# Altium PCB AdaptadorUSBSerialRS232.PcbDoc
Units mil, origin at the board's own origin, x right, y up, seen from the top; angles counter-clockwise.
Board outline 2378.52 x 1000.56 mil, 2 copper layers (Top Layer, Bottom Layer), stack 65.792 mil thick; 27 components, 35 nets, 155 pads, 52 vias.
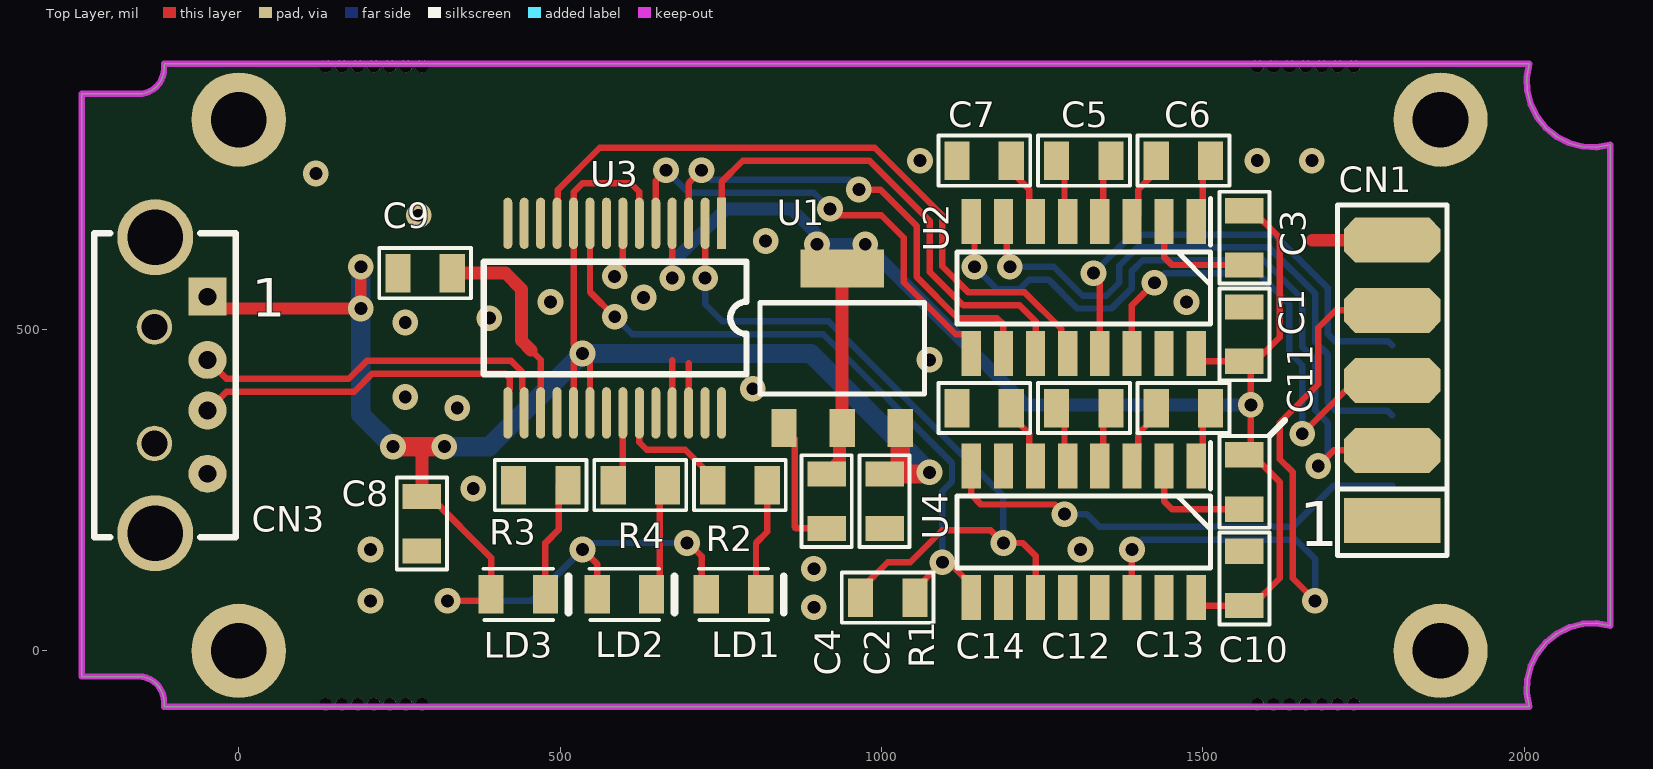
[diagram p0: Top Layer view]
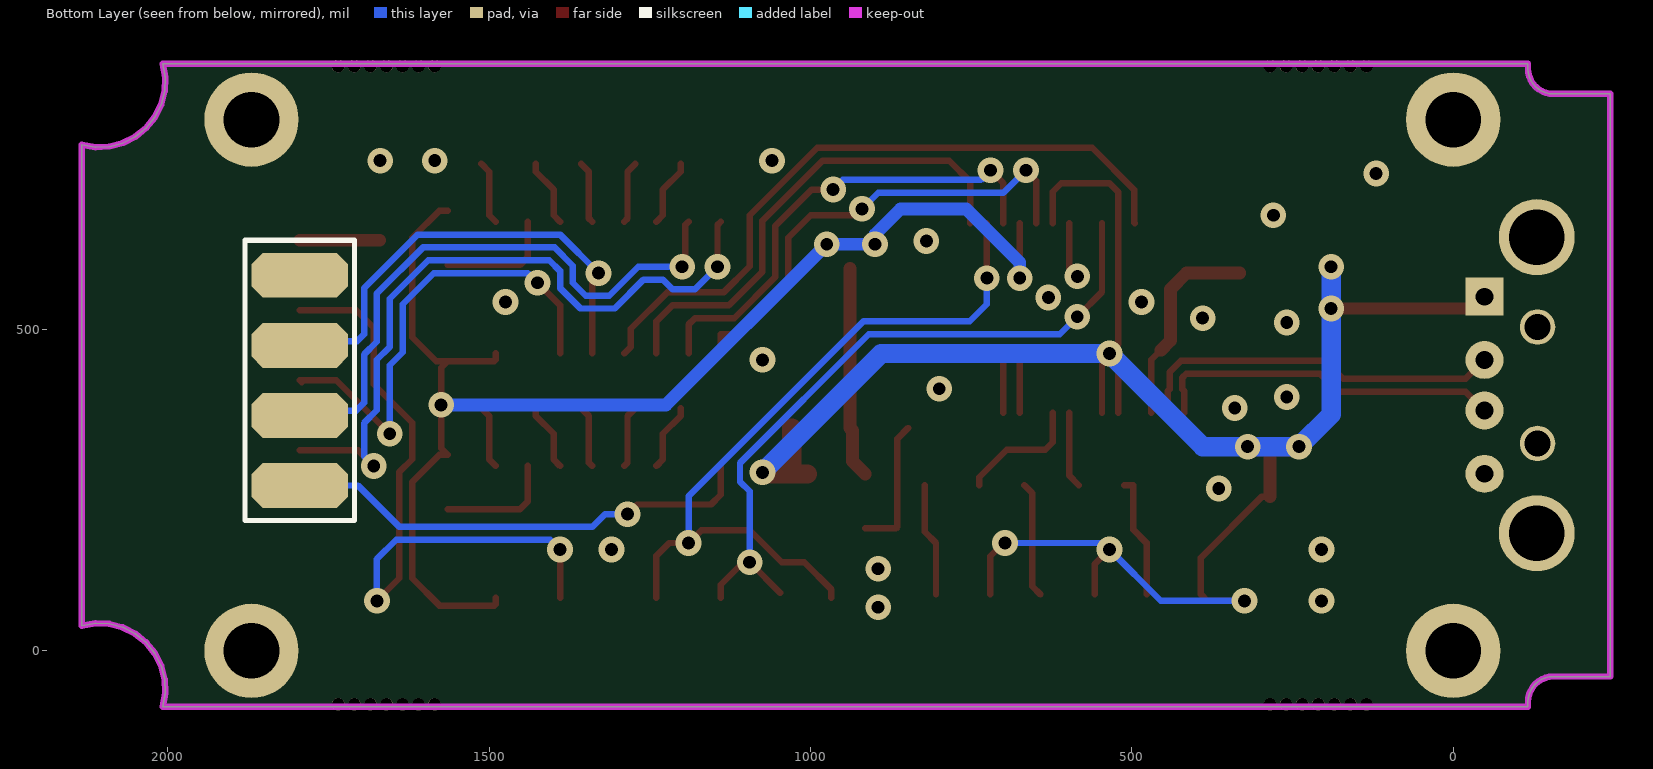
[diagram p1: Bottom Layer view, seen from below]
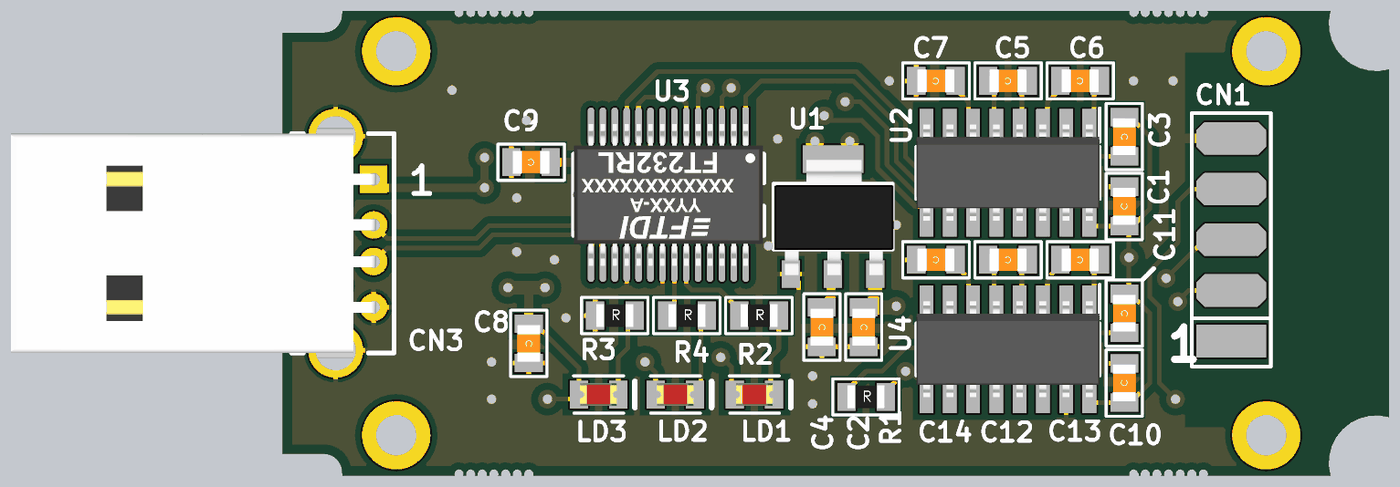
[diagram p2: 3D render of the assembled board from above, using the file's embedded part models]

## Layer stack, top to bottom
Top Solder: solder mask 0.4, Solder Resist, Dk 3.5
Top Layer: signal copper 1.4
Dielectric 1: dielectric 62.9921, FR-4, Dk 4.8
Bottom Layer: signal copper 1.4
Bottom Solder: solder mask 0.4, Solder Resist, Dk 3.5

## Board outline
-116.42,-86.9 -116.42,-79.31 -116.85,-73.5 -118.13,-67.83 -120.43,-62 -123.62,-56.61 -127.63,-51.79 -132.35,-47.67 -137.67,-44.35 -143.44,-41.92 -149.53,-40.43 -155.78,-39.94 -244.38,-39.94 -244.38,866.71 -155.78,866.71 -149.98,867.14 -144.32,868.41 -138.49,870.71 -133.09,873.9 -128.28,877.91 -124.16,882.64 -120.84,887.96 -118.41,893.73 -116.92,899.83 -116.42,906.08 -116.42,913.67 2008.09,913.67 2004.42,892.34 2005.33,870.73 2010.78,849.79 2020.52,830.47 2034.11,813.63 2050.94,800.04 2070.26,790.31 2091.2,784.86 2112.82,783.95 2134.14,787.61 2134.14,39.16 2112.82,42.82 2091.2,41.91 2070.26,36.47 2050.94,26.73 2034.11,13.14 2020.52,-3.7 2010.78,-23.02 2005.33,-43.96 2004.42,-65.57 2008.09,-86.9

## Design rules (kind name [scope] priority, off if disabled: settings)
Clearance Clearance_Poly [InPolygon] p1: gap=15 ignorepadtopadclearanceinfootprint=FALSE except(0: Arc-Hole Track-Hole SMDPad-Hole THPad-Hole Via-Hole Fill-Hole Poly-Hole Region-Hole Text-Hole)
Clearance [All] p2: gap=10 ignorepadtopadclearanceinfootprint=FALSE except(0: Arc-Hole Track-Hole SMDPad-Hole THPad-Hole Via-Hole Fill-Hole Poly-Hole Region-Hole Text-Hole)
ComponentClearance [All] p1: gap=5 collisioncheckmode=3 verticalgap=0 showdistances=FALSE
DiffPairsRouting [All] p1: maxlimit=10 minlimit=10 mostfreqgap=10 toplayer_minwidth=10 toplayer_maxwidth=10 toplayer_prefwidth=10 bottomlayer_minwidth=10 bottomlayer_maxwidth=10 bottomlayer_prefwidth=10 maxuncoupledlength=500
PolygonConnect PolygonConnect_Via [IsVia] p1: connectstyle=Direct reliefconductorwidth=10 reliefentries=4 polygonreliefangle="90 Angle" airgapwidth=10
PolygonConnect [All] p2: connectstyle=Relief reliefconductorwidth=10 reliefentries=4 polygonreliefangle="90 Angle" airgapwidth=10
RoutingVias [All] p1: holewidth=28 width=50 viastyle="Through Hole" minholewidth=20 minwidth=40 maxholewidth=28 maxwidth=50
SilkToSilkClearance [All] p1 off: silktosilkclearance=10
SolderMaskExpansion [All] p1: expansion=4
Width [All] p1: maxlimit=30 minlimit=10 preferedwidth=10 minimp=50.000000 maximp=50.000000 favimp=50.000000
27 further rules are at their usual default settings.

## Classes and differential pairs
differential pair D: +D_P -D_N

## Components (designator, comment, footprint, x,y, rotation, side; value= is the part's Value field where it differs from the comment)
C1 "100n" 0805C 1564.88,492.83 r90 top
C2 "100n" 0805C 1004.88,232.83 r270 top
C3 "100n" 0805C 1564.88,642.83 r270 top
C4 "10u" 0805C 914.88,232.83 r270 top
C5 "100n" 0805C 1314.88,762.83 r180 top
C6 "100n" 0805C 1469.88,762.83 r180 top
C7 "100n" 0805C 1159.88,762.83 r180 top
C8 "10u" 0805C 284.88,197.83 r270 top
C9 "100n" 0805C 289.88,587.83 r180 top
C10 "100n" 0805C 1564.88,112.83 r90 top
C11 "100n" 0805C 1564.88,262.83 r270 top
C12 "100n" 0805C 1314.88,377.83 r180 top
C13 "100n" 0805C 1469.88,377.83 r180 top
C14 "100n" 0805C 1159.88,377.83 r180 top
CN1 "DB9M" BARRA1X9 1794.88,420.94 r90 top
CN3 "USB" "USB-B 90" -90,413.39 r270 top
LD1 "RED" 0805L 769.88,87.83 r180 top
LD2 "RED" 0805L 599.88,87.83 r180 top
LD3 "RED" 0805L 434.88,87.83 r180 top
R1 "0" 0805R 1009.88,82.83 r0 top
R2 "680" 0805R 779.88,257.83 r0 top
R3 "680" 0805R 469.88,257.83 r0 top
R4 "680" 0805R 624.88,257.83 r0 top
U1 "LM1117" SOT223 848.33,346.83 r0 top
U2 "MAX3232" SO16 1489.88,667.83 r270 top
U3 "FT232RL" SSOP28-175-0.64 584.88,517.83 r270 top
U4 "MAX3232" SO16 1489.88,287.83 r270 top

## Footprints (in the part's own frame and the unit in brackets; to place one, negate y for a bottom-side part, rotate by r counter-clockwise, add the part's x,y. Pads: shape width x height; smd on the part's side, far side on the other; paste and mask are expansions set on the pad)
0805C [mil]
  rect 39.37x60 smd: 1(-42.3,0) 2(42.3,0)
  silkscreen extent -72,-39 71,39, body extent -40,-25 40,25, height 36
0805L [mil] "LED 0805"
  rect 39.37x60 smd: 1(-42.3,0) 2(42.3,0)
  silkscreen extent -78,-40 54,40, body extent -40,-25 40,25, height 43
0805R [mil] "Resistor"
  rect 39.37x60 smd: 1(-42.3,0) 2(42.3,0)
  silkscreen extent -72,-39 71,39, body extent -40,-25 40,24, height 20
BARRA1X9 [mil] "ESPERA DB9"
  rect 70x150 smd: 1(-218.11,0)
  oct 70x150 smd: 2(-109.06,0) 3(0,0) 4(109.06,0) 5(218.11,0)
  oct 70x150 smd far side: 6(-163.58,0) 7(-54.53,0) 8(54.53,0) 9(163.58,0)
  silkscreen extent -273,-85 273,85
SO16 [mil]
  rect 70x30 smd: 1(0,0) 2(0,-50) 3(0,-100) 4(0,-150) 5(0,-200) 6(0,-250) 7(0,-300) 8(0,-350) 9(205,-350) 10(205,-300) 11(205,-250) 12(205,-200) 13(205,-150) 14(205,-100) 15(205,-50) 16(205,0)
  silkscreen extent -36,-372 159,22, body extent -1,-372 206,22, height 55
SOT223 [mm]
  rect 1x1.5 smd: 1(0,0) 2(2.3,0) 3(4.6,0)
  rect 3.3x1.5 smd: 2(2.3,6.3)
  silkscreen extent -0.95,1.35 5.55,4.95, body extent -0.9,-0.05 5.6,6.25, height 1.68
SSOP28-175-0.64 [mil]
  rect 80x14 smd: 1(-147.5,166.34)
  oval 80x14 smd: 2(-147.5,140.75) 3(-147.5,115.16) 4(-147.5,89.57) 5(-147.5,63.98) 6(-147.5,38.39) 7(-147.5,12.8) 8(-147.5,-12.8) 9(-147.5,-38.39) 10(-147.5,-63.98) 11(-147.5,-89.57) 12(-147.5,-115.16) 13(-147.5,-140.75) 14(-147.5,-166.34) 15(147.5,-166.34) 16(147.5,-140.75) 17(147.5,-115.16) 18(147.5,-89.57) 19(147.5,-63.98) 20(147.5,-38.39) 21(147.5,-12.8) 22(147.5,12.8) 23(147.5,38.39) 24(147.5,63.98) 25(147.5,89.57) 26(147.5,115.16) 27(147.5,140.75) 28(147.5,166.34)
  silkscreen extent -88,-204 88,205, body extent -153,-203 153,203, height 85
"USB-B 90" [mm] "Conector USB fêmea 90°"
  rect 1.5x1.5 hole 0.7: 1(-3.5,1.05)
  round 1.5 hole 0.7: 2(-1,1.05) 3(1,1.05) 4(3.5,1.05)
  round 1.397 hole 1.016: PH0(-2.3,-1.05) PH1(2.3,-1.05)
  round 3 hole 2.2: PH2(-5.851,-1.018) PH3(5.851,-1.018)
  silkscreen extent -6,-3.43 6,2.16, body extent -6.3,-18.75 6.3,1.18, height 3.14

## Part data
C1 C2 C3 C5 C6 C7 C10 C11 C12 C13 C14: library part CAP, "CAPACITOR SMD 0805 100nF/50V X7R", Meu PN=10.10.104
C4 C8: library part CAP, "CAPACITOR SMD 0805 10UF/6,3V X7R", Meu PN=10.10.106
C9: library part CAP, "CAPACITOR SMD 0805 100NF/50V X7R", Meu PN=10.10.104
CN1: library part "Header 9", "Espera para DB9 M"
CN3: library part "Header 6", "CONECTOR USB", Meu PN=11.10.001
LD1 LD2 LD3: library part LED, "LED 0805 VERMELHO", Meu PN=10.11.001
  LD1: Funcao=TX
  LD2: Funcao=RX
  LD3: Funcao=PW
R1: library part RES, "RESISTOR SMD 0805 0 OHM (JUMPER)", Meu PN=10.12.000
R2 R3 R4: library part RES, "RESISTOR SMD 0805 680 OHM", Meu PN=10.12.681
U1: "REGULADOR LINEAR SMD LM1117MPX-3.3", Meu PN=10.13.117
U2 U4: library part MAX232, "CI SMD MAX3232 SO16 NARROW", Meu PN=10.13.323
U3: library part CMP-0078-00027-1, "USB UART FT232RL, SSOP-28, Tray"

## Free pads (board coordinates)
  round 146.8 hole 86.61: 1(0,826.77) 1(0,0) 1(1870.08,826.77) 1(1870.08,0)
  round 19.68 hole 19.68 unplated paste+0: 7(160,910) 7(160,-83.23) 7(1710.08,910) 7(1710.08,-83.23) 8(135,910) 8(135,-83.23) 8(185,910) 8(185,-83.23) 8(210,910) 8(210,-83.23) 8(235,910) 8(235,-83.23) 8(260,910) 8(260,-83.23) 8(285,910) 8(285,-83.23) 8(1585.08,910) 8(1585.08,-83.23) 8(1610.08,910) 8(1610.08,-83.23) 8(1635.08,910) 8(1635.08,-83.23) 8(1660.08,910) 8(1660.08,-83.23) 8(1685.08,910) 8(1685.08,-83.23) 8(1735.08,910) 8(1735.08,-83.23)

## Via types
v1: diameter 40, hole 20, Top Layer to Bottom Layer, tented both sides, 52 vias

## Nets (pads, with @x,y where several pads share a name; then routed paths per layer and width w, separated by ;. In a path a pad name is that pad's centre, name@x,y a point inside that pad or via, vN(x,y) a via of type N, cw(c..) or ccw(c..) an arc to the next point about the centre after c; other vN are vias at no path point)
232_CTS: CN1.8 U2.13 | length 732.3
  Top Layer w10: v1(1329.88,587.83) 1339.88,577.83 U2.13
  Bottom Layer w10: v1(1329.88,587.83) 1389.88,647.83 1611.45,647.83 1694.88,564.4 1694.88,492.83 1705.72,482 1788.35,482 CN1.8
232_DSR: CN1.6 U4.8 | length 747.4
  Top Layer w10: U4.8 1139.88,242.83 1154.88,227.83 1269.88,227.83 v1(1284.88,212.83)
  Bottom Layer w10: v1(1284.88,212.83) 1319.88,212.83 1339.88,192.83 1639.83,192.83 1704.36,257.36 CN1.6
232_DTR: CN1.4 U4.14 | length 1042.5
  Top Layer w10: U4.14 v1(1389.88,157.83) ; v1(1674.88,77.83) 1639.88,112.83 1639.88,278.34 1619.88,298.34 1619.88,354.88 1680,415 1680,502.95 1707.05,530 CN1.4
  Bottom Layer w10: v1(1389.88,157.83) 1404.88,172.83 1644.88,172.83 1674.88,142.83 v1(1674.88,77.83)
232_RTS: CN1.7 U2.7 | length 930.6
  Top Layer w10: U2.7 1194.88,662.83 1194.88,602.83 v1(1199.88,597.83)
  Bottom Layer w10: v1(1199.88,597.83) 1268.17,597.83 1313.17,552.83 1349.88,552.83 1369.88,572.83 1369.88,599.55 1398.17,627.83 1603.17,627.83 1674.88,556.12 1674.88,481.12 1694.88,461.12 1694.88,386.12 1707,374 1787.3,374 CN1.7
232_RX: CN1.2 U2.8 | length 1100.7
  Top Layer w10: U2.8 1144.88,662.83 v1(1144.88,597.83) ; v1(1679.88,287.83) 1703.94,311.89 CN1.2
  Bottom Layer w10: v1(1144.88,597.83) 1179.88,562.83 1214.88,562.83 1229.88,577.83 1259.88,577.83 1304.88,532.83 1358.17,532.83 1389.88,564.55 1389.88,591.27 1406.45,607.83 1594.88,607.83 1654.88,547.83 1654.88,472.83 1674.88,452.83 1674.88,374.55 1694.88,354.55 1694.88,302.83 v1(1679.88,287.83)
232_TX: CN1.3 U2.14 | length 749.5
  Top Layer w10: U2.14 1389.88,537.83 v1(1424.88,572.83) ; v1(1654.88,337.83) 1737.99,420.94 CN1.3 CN1.3@1791.77,417.83
  Bottom Layer w10: v1(1424.88,572.83) 1439.88,587.83 1586.6,587.83 1634.88,539.55 1634.88,464.55 1654.88,444.55 v1(1654.88,337.83)
+3.3: C1.1 C3.1 C4.1 C10.1 C11.1 U1.2 U2.16 U3.4 U4.16 | length 2428.2
  Top Layer w10: v1(674.45,580) U3.4 ; U4.16 1489.88,72.83 1492.18,70.53 C10.1 1577.58,70.53 1619.88,112.83 1619.88,262.83 1577.58,305.14 C11.1 1574.88,315.14 v1(1574.88,382.83) 1574.88,440.53 C1.1 ; U2.16 1489.88,452.83 1492.18,450.53 C1.1 ; C3.1 1577.58,685.14 1619.88,642.83 1619.88,487.83 1582.58,450.53 C1.1
  Top Layer w20: C4.1 934.88,295.14 934.88,342.83 938.88,346.83 U1.2@938.88,594.87
  Bottom Layer w20: v1(674.45,580) 674.45,604.45 757.83,687.83 859.88,687.83 899.88,647.83 v1(899.88,632.83) v1(974.88,632.83) 1224.88,382.83 v1(1574.88,382.83)
CTS: U2.12 U3.11 | length 1068.8
  Top Layer w10: U3.11 496.08,666.1 496.08,717.32 561.6,782.83 989.73,782.83 1094.88,677.69 1094.88,598.34 1135.38,557.83 1223.17,557.83 1279.88,501.12 1279.88,472.83 U2.12
D_N: CN3.2 U3.16 | length 585.4
  Top Layer w10: CN3.2 -19.29,423.39 171.22,423.39 199.03,451.19 423.76,451.19 441.34,433.62 441.34,407.21 444.13,404.42 U3.16
D_P: CN3.3 U3.15 | length 552.3
  Top Layer w10: CN3.3 -19.29,403.39 179.51,403.39 207.31,431.19 415.48,431.19 421.34,425.33 421.34,407.21 418.54,404.42 U3.15
DSR: R1.2 U3.9 U4.9 | length 1088.1
  Top Layer w10: U3.9 546.5,558.5 v1(585,520) ; R1.2@1047.18,90.14 v1(1094.88,137.83) 1104.88,137.83 1139.88,102.83 U4.9
  Bottom Layer w10: v1(585,520) 612.17,492.83 909.38,492.83 1109.88,292.33 1109.88,263.34 1094.88,248.34 v1(1094.88,137.83)
DTR: R1.1 U3.2 U4.11 | length 1191.5
  Top Layer w10: v1(725.63,580) U3.2 ; R1.1 967.58,95.53 1009.88,137.83 1044.88,137.83 1094.88,187.83 1169.88,187.83 v1(1189.88,167.83) 1219.88,167.83 1239.88,147.83 U4.11
  Bottom Layer w10: v1(725.63,580) 725.63,539.37 752.17,512.83 917.66,512.83 1189.88,240.62 v1(1189.88,167.83)
GND: C1.2 C2.2 C4.2 C7.2 C8.2 C9.2 C10.2 C14.2 CN1.5 CN3.4 CN3.PH2 CN3.PH3 R3.1 U1.1 U2.15 U3.7 U3.18 U3.21 U3.25 U3.26 U4.15 | length 582.8
  Top Layer w10: v1(584.88,582.83) 597.68,595.63 U3.7 ; U3.25 674.45,452.4 ; U3.26 700.04,447.68 ; U1.1 864.88,330.28 864.88,192.83 867.18,190.53 C4.2
  Top Layer w20: 1671.1,639.06 CN1.5
  other v1: 894.88,67.83 204.88,77.83 894.88,127.83 204.88,157.83 1309.88,157.83 364.88,252.83 339.88,377.83 259,395 799.88,407.83 1074.88,452.83 259,511 389.88,517.83 484.88,542.83 1474.88,542.83 630,550 819.88,637.83 279.88,677.83 119.88,742.83 1059.88,762.83 1584.88,762.83 1669.88,762.83
NetC3_2: C3.2 U2.2 | length 185.1
  Top Layer w10: U2.2 1439.88,612.83 1452.18,600.53 C3.2
NetC5_1: C5.1 U2.4 | length 97.2
  Top Layer w10: U2.4 1344.88,672.83 1344.88,745.53 C5.1@1357.18,757.83
NetC5_2: C5.2 U2.5 | length 97.2
  Top Layer w10: C5.2@1272.58,757.83 1284.88,745.53 1284.88,672.83 U2.5
NetC6_1: C6.1 U2.1 | length 99.2
  Top Layer w10: U2.1 1499.88,677.83 1499.88,745.53 C6.1@1512.18,757.83
NetC6_2: C6.2 U2.3 | length 105.6
  Top Layer w10: U2.3 1399.88,677.83 1399.88,717.83 1427.58,745.53 C6.2@1427.58,757.83
NetC7_1: C7.1 U2.6 | length 105.6
  Top Layer w10: C7.1@1202.18,757.83 1202.18,745.53 1229.88,717.83 1229.88,677.83 U2.6
NetC9_1: C9.1 U3.17 | length 322.9
  Top Layer w10: 454.88,467.83 469.72,452.99 U3.17
  Top Layer w20: C9.1 414.88,587.83 439.88,562.83 439.88,482.83 454.88,467.83
NetC11_2: C11.2 U4.2 | length 185.1
  Top Layer w10: U4.2 1439.88,232.83 1452.18,220.53 C11.2
NetC12_1: C12.1 U4.4 | length 97.2
  Top Layer w10: U4.4 1344.88,292.83 1344.88,365.53 C12.1
NetC12_2: C12.2 U4.5 | length 97.2
  Top Layer w10: C12.2 1284.88,365.53 1284.88,292.83 U4.5
NetC13_1: C13.1 U4.1 | length 99.2
  Top Layer w10: U4.1 1499.88,297.83 1499.88,365.53 C13.1
NetC13_2: C13.2 U4.3 | length 105.6
  Top Layer w10: U4.3 1399.88,297.83 1399.88,337.83 1427.58,365.53 C13.2
NetC14_1: C14.1 U4.6 | length 105.6
  Top Layer w10: C14.1 1202.18,365.53 1229.88,337.83 1229.88,297.83 U4.6
NetLD1_1: LD1.1 R2.2 | length 177.2
  Top Layer w10: LD1.1@804.88,87.83 804.88,167.83 822.18,185.14 R2.2
NetLD2_1: LD2.1 R4.2 | length 180.4
  Top Layer w10: LD2.1 654.88,100.53 654.88,245.53 R4.2
NetLD3_1: LD3.1 R3.2 | length 193.1
  Top Layer w10: LD3.1 477.18,168.02 497.58,188.41 497.58,257.83 R3.2
NetR2_1: R2.1 U3.23 | length 195
  Top Layer w10: U3.23 623.27,324.45 634.88,312.83 694.88,312.83 737.58,270.14 R2.1
NetR4_1: R4.1 U3.22 | length 118.8
  Top Layer w10: R4.1 597.68,272.93 U3.22
RTS: U2.10 U3.3 | length 751.6
  Top Layer w10: U3.3 700.04,727.99 v1(719.88,747.83) ; v1(964.88,717.83) 998.17,717.83 1054.88,661.12 1054.88,581.77 1118.82,517.83 1179.88,517.83 1189.88,507.83 U2.10
  Bottom Layer w10: v1(719.88,747.83) 734.88,732.83 949.88,732.83 v1(964.88,717.83)
RX: U2.9 U3.5 | length 740.4
  Top Layer w10: U3.5 648.86,731.81 v1(664.88,747.83) ; v1(919.88,687.83) 929.88,677.83 999.88,677.83 1034.88,642.83 1034.88,573.48 1115.53,492.83 1139.88,492.83 U2.9
  Bottom Layer w10: v1(664.88,747.83) 699.88,712.83 894.88,712.83 v1(919.88,687.83)
TX: U2.11 U3.1 | length 766.8
  Top Layer w10: U3.1 751.22,729.68 784.38,762.83 981.45,762.83 1074.88,669.4 1074.88,590.05 1127.1,537.83 1214.88,537.83 1239.88,512.83 U2.11
VCC: C2.1 C8.1 CN3.1 LD1.2 LD2.2 LD3.2 U1.3 U3.6 U3.10 U3.19 U3.20 | length 3355.6
  Top Layer w10: C8.1 297.58,240.14 392.58,145.14 LD3.2 382.58,77.83 v1(324.88,77.83) ; U3.19 520.91,448.86 v1(534.88,462.83) ; v1(534.88,157.83) 557.58,135.14 LD2.2 ; U3.20 546.5,451.22 v1(534.88,462.83) ; U3.6 623.27,714.45 609.88,727.83 534.88,727.83 520.91,713.86 U3.10 520.91,476.81 v1(534.88,462.83) ; v1(697.38,167.83) 699.88,167.83 720.28,147.44 LD1.2@720.28,87.83
  Top Layer w18: CN3.1 -30.32,532.83 v1(189.88,532.83) v1(189.88,597.83)
  Top Layer w20: C8.1 284.88,317.83
  Top Layer w30: v1(239.88,317.83) 284.88,317.83 v1(319.88,317.83) ; C2.1 C2.1@1029.43,275.14 ; U1.3 C2.1@1029.43,275.14 ; v1(1074.88,277.83) 1072.18,275.14 C2.1@1029.43,275.14
  Bottom Layer w10: v1(324.88,77.83) 454.88,77.83 v1(534.88,157.83) 544.88,167.83 v1(697.38,167.83)
  Bottom Layer w30: v1(189.88,597.83) v1(189.88,532.83) 189.88,367.83 v1(239.88,317.83) v1(319.88,317.83) 389.88,317.83 v1(534.88,462.83) 889.88,462.83 v1(1074.88,277.83)
pads on no net: CN1.1 CN1.9 CN3.PH0 CN3.PH1 U3.8 U3.12 U3.13 U3.14 U3.24 U3.27 U3.28 U4.7 U4.10 U4.12 U4.13

## Polygon pours and split planes (outlines as drawn)
GND on Bottom Layer "Top Bottom" (solid, remove dead copper, shelved, pour order 5): -116.42,-86.9 -116.42,-79.31 -116.85,-73.5 -118.13,-67.83 -120.43,-62 -123.62,-56.61 -127.63,-51.79 -132.35,-47.67 -137.67,-44.35 -143.44,-41.92 -149.53,-40.43 -155.78,-39.94 -244.38,-39.94 -244.38,866.71 -155.78,866.71 -149.98,867.14 -144.32,868.41 -138.49,870.71 -133.09,873.9 -128.28,877.91 -124.16,882.64 -120.84,887.96 -118.41,893.73 -116.92,899.83 -116.42,906.08 -116.42,913.67 2008.09,913.67 2004.42,892.34 2005.33,870.73 2010.78,849.79 2020.52,830.47 2034.11,813.63 2050.94,800.04 2070.26,790.31 2091.2,784.86 2112.82,783.95 2134.14,787.61 2134.14,39.16 2112.82,42.82 2091.2,41.91 2070.26,36.47 2050.94,26.73 2034.11,13.14 2020.52,-3.7 2010.78,-23.02 2005.33,-43.96 2004.42,-65.57 2008.09,-86.9
GND on Top Layer "Top Layer" (solid, remove dead copper, shelved, pour order 4): -116.42,-86.9 -116.42,-79.31 -116.85,-73.5 -118.13,-67.83 -120.43,-62 -123.62,-56.61 -127.63,-51.79 -132.35,-47.67 -137.67,-44.35 -143.44,-41.92 -149.53,-40.43 -155.78,-39.94 -244.38,-39.94 -244.38,866.71 -155.78,866.71 -149.98,867.14 -144.32,868.41 -138.49,870.71 -133.09,873.9 -128.28,877.91 -124.16,882.64 -120.84,887.96 -118.41,893.73 -116.92,899.83 -116.42,906.08 -116.42,913.67 2008.09,913.67 2004.42,892.34 2005.33,870.73 2010.78,849.79 2020.52,830.47 2034.11,813.63 2050.94,800.04 2070.26,790.31 2091.2,784.86 2112.82,783.95 2134.14,787.61 2134.14,39.16 2112.82,42.82 2091.2,41.91 2070.26,36.47 2050.94,26.73 2034.11,13.14 2020.52,-3.7 2010.78,-23.02 2005.33,-43.96 2004.42,-65.57 2008.09,-86.9

## Keep-outs
Keep-Out Layer:
  the board outline again, w10

## Other copper
Top Layer:
  pour cut-out: 1889.88,824.06 1694.88,824.06 1694.88,17.83 1889.88,17.83
Bottom Layer:
  pour cut-out: 1889.88,824.06 1694.88,824.06 1694.88,17.83 1889.88,17.83

## Silkscreen, mask and mechanical layers (free items; w line width, h text height)
Top Overlay:
  lines w10: 1603.88,334.53 1628,358.65
M3-Route:
  lines w39.37: 120,-106.58 35,-106.58 -116.42,-106.58 ; 120,933.35 35,933.35 -116.42,933.35 ; 300,-106.58 1485.08,-106.58 1570.08,-106.58 ; 300,933.35 1485.08,933.35 1570.08,933.35 ; 1750.08,-106.58 1835.08,-106.58 2008.09,-106.58 ; 1750.08,933.35 1835.08,933.35 2008.09,933.35 ; -264.06,-39.94 ccw(c-244.38,-39.94) -244.38,-59.62 ; -264.06,-39.94 ccw(c-244.38,-39.94) -244.38,-59.62 ; -264.06,-39.94 -264.06,866.71 ; -264.06,866.71 cw(c-244.38,866.71) -244.38,886.39 ; -264.06,866.71 cw(c-244.38,866.71) -244.38,886.39 ; -244.38,-59.62 -156.56,-59.62 -152.66,-59.93 -149.63,-60.67 -146.76,-61.88 -144.11,-63.54 -141.76,-65.59 -139.76,-67.99 -138.17,-70.68 -137,-73.64 -136.38,-76.41 -136.11,-80.03 -136.11,-86.9 ; -244.38,886.39 -156.5,886.39 -152.89,886.66 -150.12,887.28 -147.16,888.45 -144.48,890.04 -142.08,892.04 -140.03,894.39 -138.37,897.04 -137.16,899.92 -136.42,902.96 -136.11,906.86 -136.11,913.67 ; -136.11,-86.9 ccw(c-116.42,-86.9) -116.42,-106.58 ; -136.11,-86.9 ccw(c-116.42,-86.9) -116.42,-106.58 ; -136.11,913.67 cw(c-116.42,913.67) -116.42,933.35 ; -136.11,913.67 cw(c-116.42,913.67) -116.42,933.35 ; 2008.09,-106.58 ccw(c2008.09,-86.9) 2027.77,-86.9 ; 2008.09,-106.58 ccw(c2008.09,-86.9) 2027.77,-86.9 ; 2008.09,933.35 cw(c2008.09,913.67) 2027.77,913.67 ; 2008.09,933.35 cw(c2008.09,913.67) 2027.77,913.67 ; 2027.48,-83.52 cw(c2008.09,-86.9) 2027.77,-86.9 ; 2027.48,-83.52 2027.49,-83.56 cw(c2008.09,-86.9) 2027.77,-86.9 ; 2027.48,-83.52 2024.18,-64.3 2024.91,-46.88 2029.3,-30 2037.15,-14.43 2048.11,-0.86 2061.67,10.09 2077.25,17.94 2094.13,22.33 2111.55,23.07 2130.8,19.76 ; 2027.49,910.33 ccw(c2008.09,913.67) 2027.77,913.67 ; 2027.49,910.33 ccw(c2008.09,913.67) 2027.77,913.67 ; 2027.49,910.33 2024.18,891.08 2024.91,873.65 2029.3,856.78 2037.15,841.2 2048.11,827.63 2061.67,816.68 2077.25,808.83 2094.13,804.44 2111.55,803.7 2130.8,807.02 ; 2130.8,19.76 ccw(c2134.14,39.16) 2153.83,39.16 ; 2130.8,19.76 ccw(c2134.14,39.16) 2153.83,39.16 ; 2130.8,807.02 cw(c2134.14,787.61) 2153.83,787.61 ; 2130.8,807.02 cw(c2134.14,787.61) 2153.83,787.61 ; 2153.83,39.16 2153.83,787.61

## Text inside footprints (layer, text, board x,y; h text height)
CN1: Top Overlay "1" at 1649.88,162.83 h70
CN3: Top Overlay "1" at 20,520 h60